# EAGLE board ttl (EAGLE 5.01)
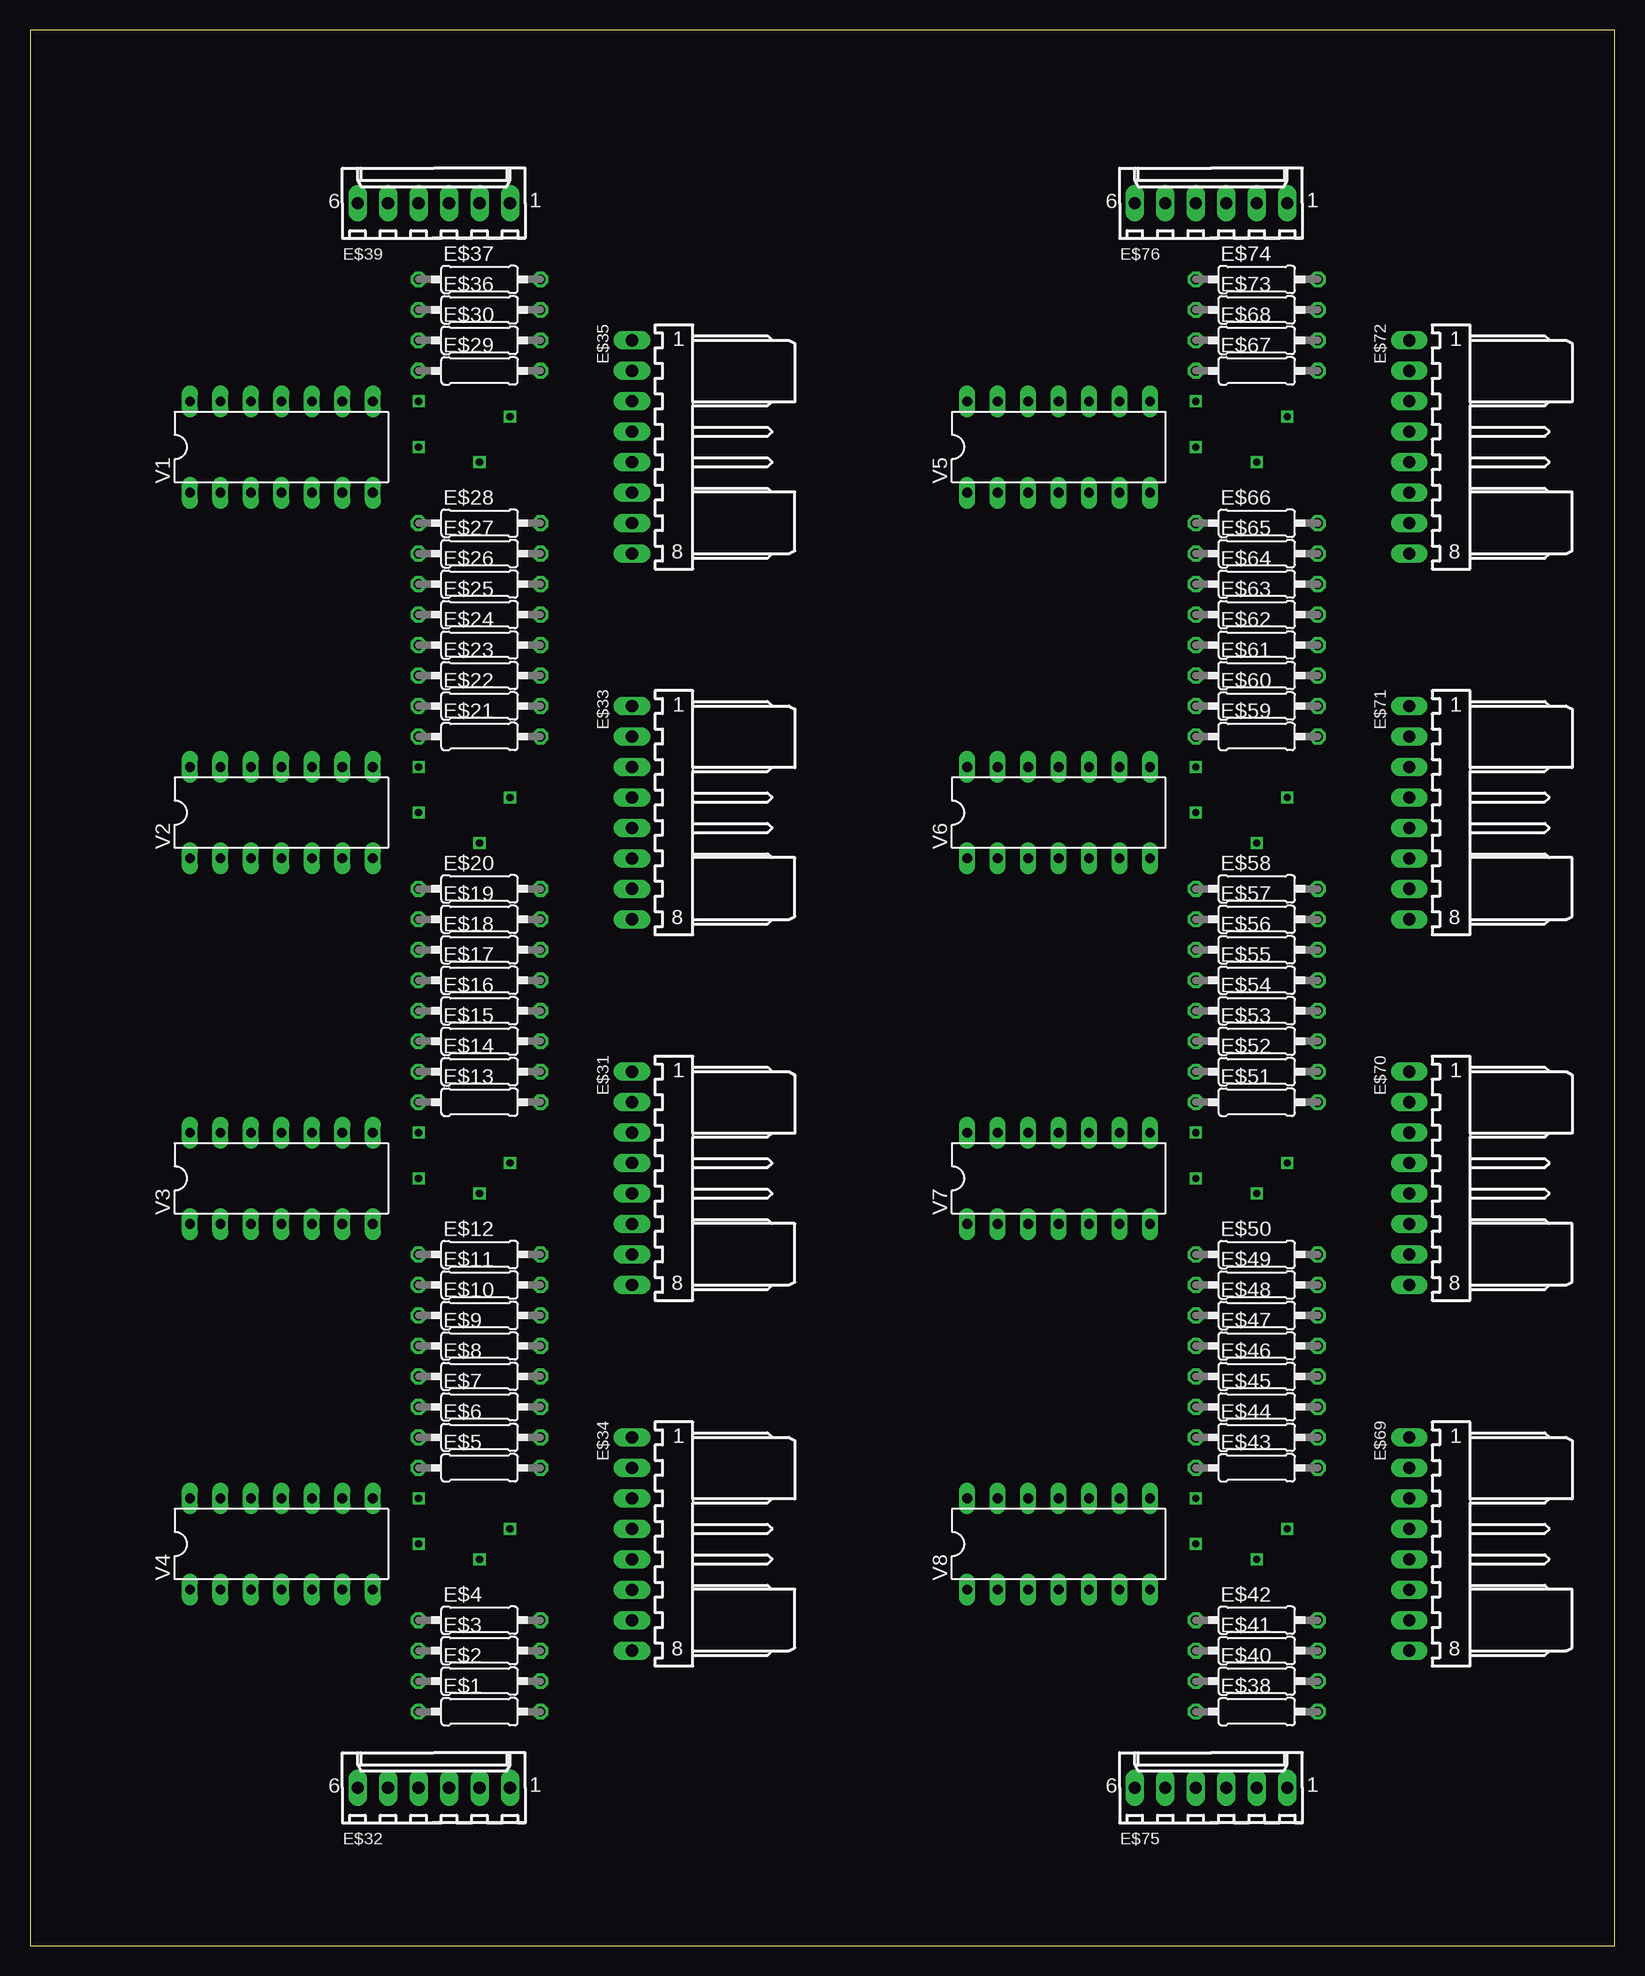
[diagram p0: board, top side]
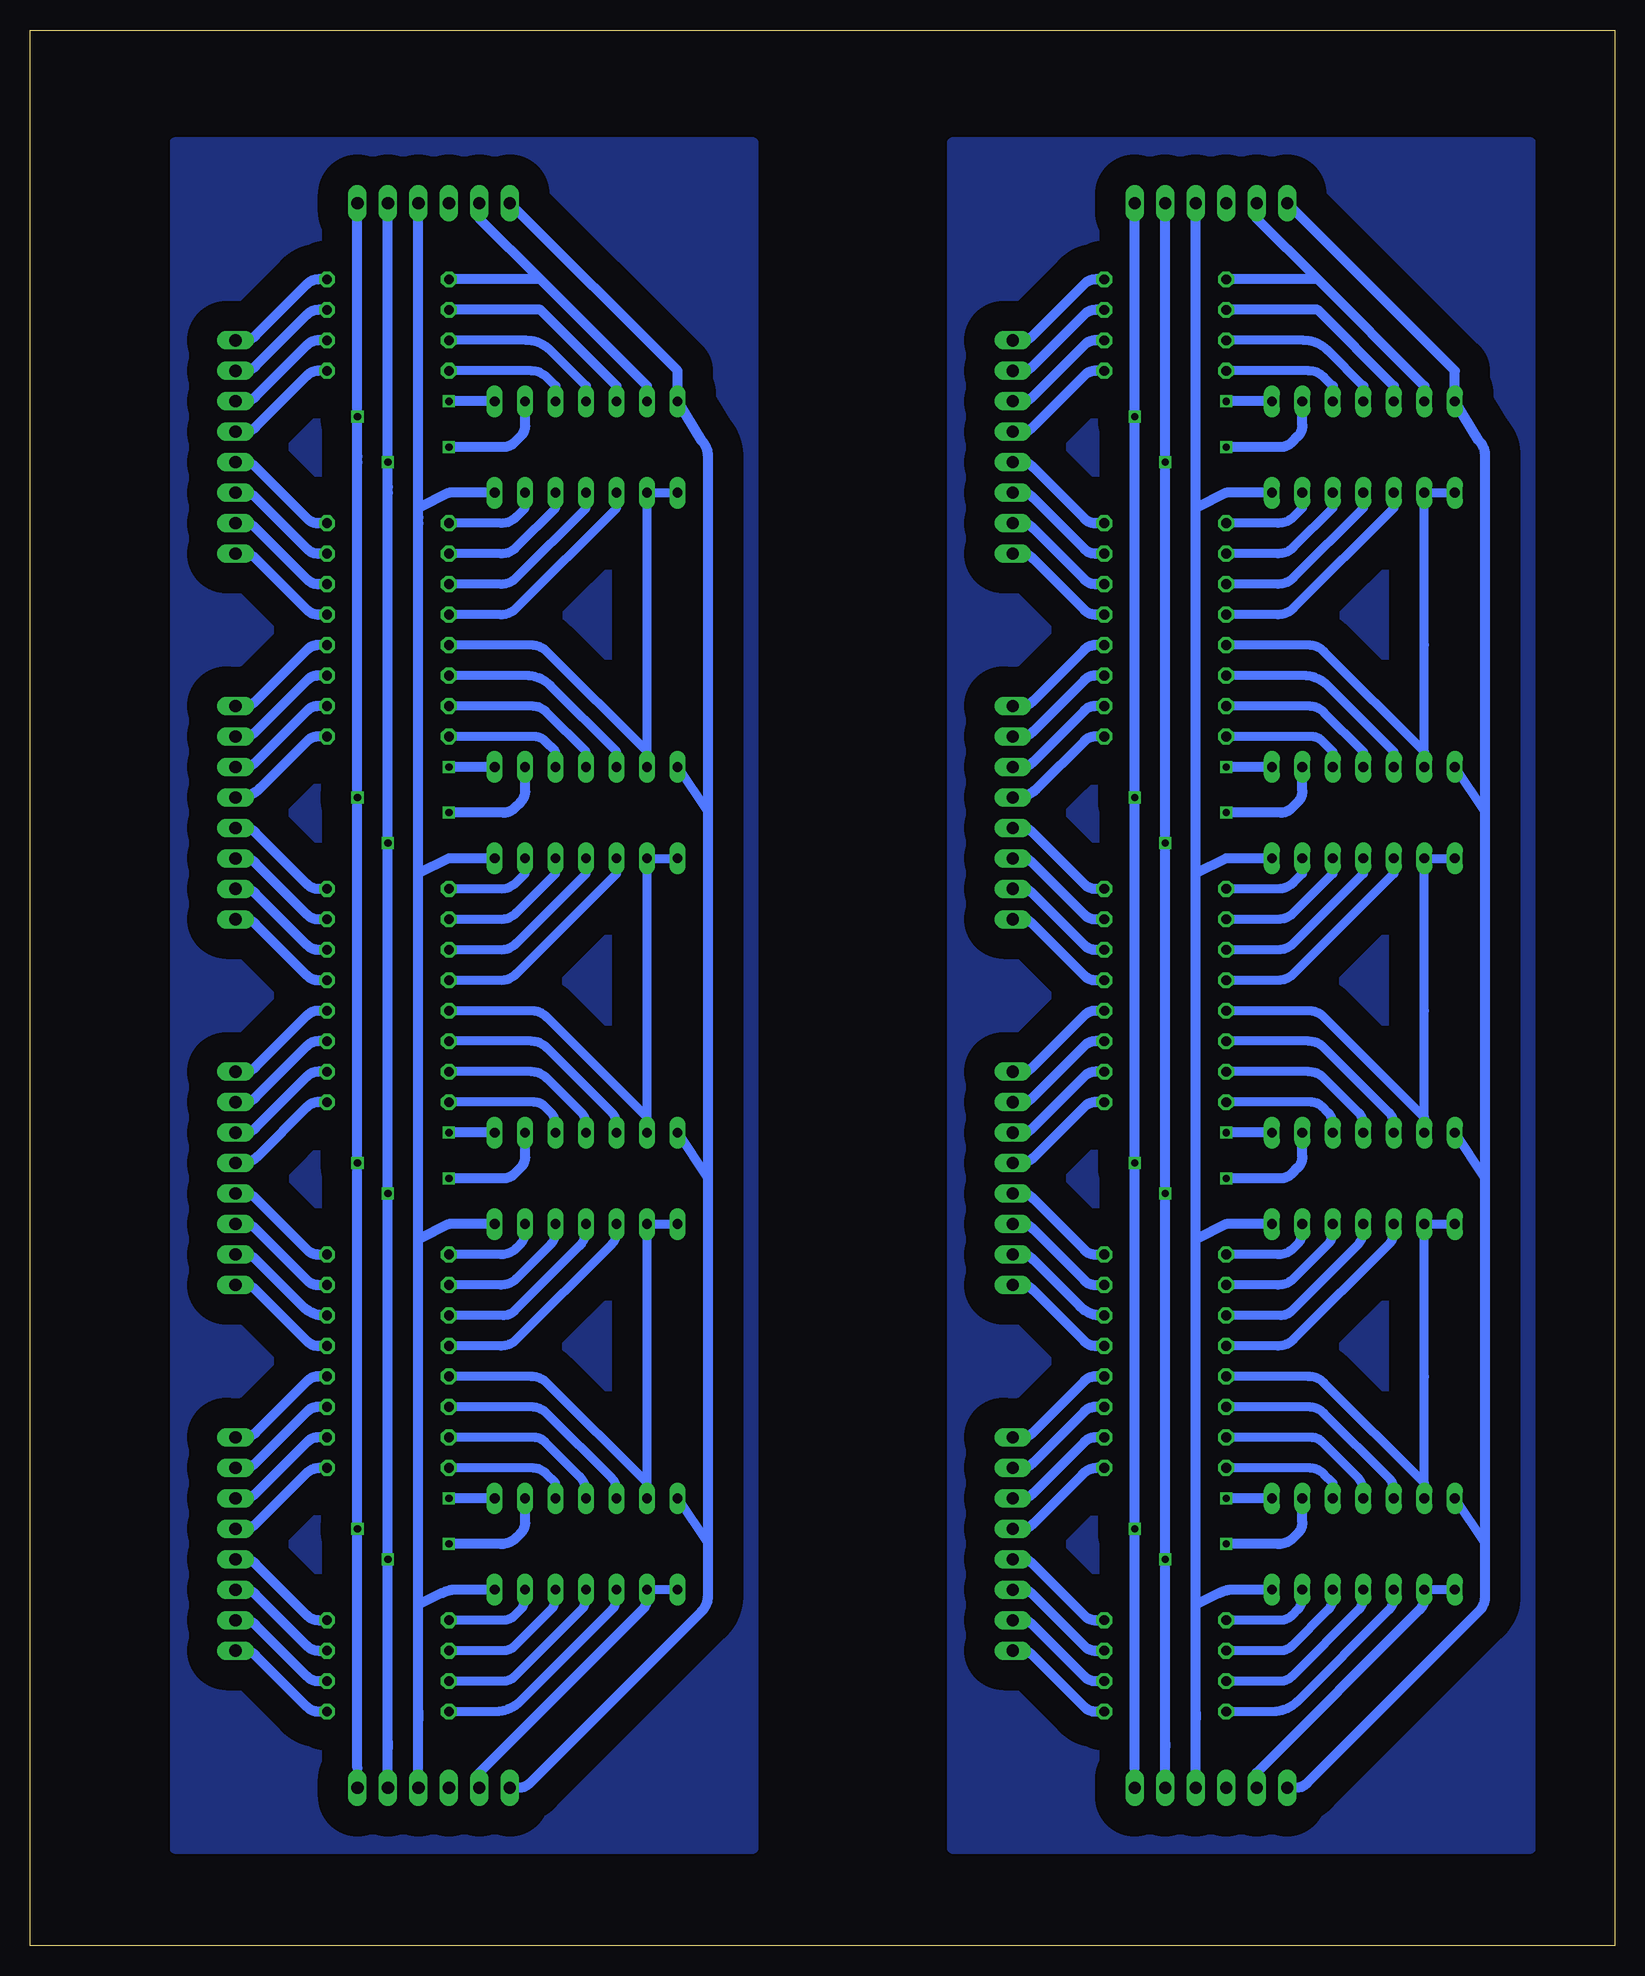
[diagram p1: board, bottom side, seen from below]

Size 132.06 x 159.69 mm. Coordinates in mm from the lower left corner, seen from the top.
Outline: 0,0 132.06,0 132.06,159.69 0,159.69 0,0
Copper layers (1*16): Top 0.035mm / dielectric 1.5mm / Bottom 0.035mm
Design rules "default *": minimum track width 32mil, minimum drill 24mil, track to track 8mil, track to pad 8mil, pad to pad 8mil, via to via 8mil, smd to smd 8mil, copper to edge 40mil, drill to drill 8mil, minimum pad ring 10mil, minimum via ring 8mil, stop-mask expansion 4mil, vias tented up to drill 0mil, thermal gap 10mil

## Footprints (pad centres in the part's own frame; a part is rotated, then mirrored left to right if it is on the bottom)
0207/10 = drill 0.813 octagon: 1 -5.08,0; 2 5.08,0
7395-08 = drill 1.016 long: 1 8.89,0; 2 6.35,0; 3 3.81,0; 4 1.27,0; 5 -1.27,0; 6 -3.81,0; 7 -6.35,0; 8 -8.89,0
6410-06 = drill 1.016 long: 1 6.35,0; 2 3.81,0; 3 1.27,0; 4 -1.27,0; 5 -3.81,0; 6 -6.35,0
DIL14 = drill 0.813 long: 1 -7.62,-3.81; 2 -5.08,-3.81; 3 -2.54,-3.81; 4 0,-3.81; 5 2.54,-3.81; 6 5.08,-3.81; 7 7.62,-3.81; 8 7.62,3.81; 9 5.08,3.81; 10 2.54,3.81; 11 0,3.81; 12 -2.54,3.81; 13 -5.08,3.81; 14 -7.62,3.81

## Placement (x,y rotation side)
E$1  [0207/10]  37.46,19.52 0 top
E$2  [0207/10]  37.46,22.06 0 top
E$3  [0207/10]  37.46,24.6 0 top
E$4  [0207/10]  37.46,27.14 0 top
E$5  [0207/10]  37.46,39.84 0 top
E$6  [0207/10]  37.46,42.38 0 top
E$7  [0207/10]  37.46,44.92 0 top
E$8  [0207/10]  37.46,47.46 0 top
E$9  [0207/10]  37.46,50 0 top
E$10  [0207/10]  37.46,52.54 0 top
E$11  [0207/10]  37.46,55.08 0 top
E$12  [0207/10]  37.46,57.62 0 top
E$13  [0207/10]  37.46,70.32 0 top
E$14  [0207/10]  37.46,72.86 0 top
E$15  [0207/10]  37.46,75.4 0 top
E$16  [0207/10]  37.46,77.94 0 top
E$17  [0207/10]  37.46,80.48 0 top
E$18  [0207/10]  37.46,83.02 0 top
E$19  [0207/10]  37.46,85.56 0 top
E$20  [0207/10]  37.46,88.1 0 top
E$21  [0207/10]  37.46,100.8 0 top
E$22  [0207/10]  37.46,103.34 0 top
E$23  [0207/10]  37.46,105.88 0 top
E$24  [0207/10]  37.46,108.42 0 top
E$25  [0207/10]  37.46,110.96 0 top
E$26  [0207/10]  37.46,113.5 0 top
E$27  [0207/10]  37.46,116.04 0 top
E$28  [0207/10]  37.46,118.58 0 top
E$29  [0207/10]  37.46,131.28 0 top
E$30  [0207/10]  37.46,133.82 0 top
E$31  [7395-08]  50.16,63.97 90 top
E$32  [6410-06]  33.65,13.17 0 top
E$33  [7395-08]  50.16,94.45 90 top
E$34  [7395-08]  50.16,33.49 90 top
E$35  [7395-08]  50.16,124.93 90 top
E$36  [0207/10]  37.46,136.36 0 top
E$37  [0207/10]  37.46,138.9 0 top
E$38  [0207/10]  102.23,19.52 0 top
E$39  [6410-06]  33.65,145.25 0 top
E$40  [0207/10]  102.23,22.06 0 top
E$41  [0207/10]  102.23,24.6 0 top
E$42  [0207/10]  102.23,27.14 0 top
E$43  [0207/10]  102.23,39.84 0 top
E$44  [0207/10]  102.23,42.38 0 top
E$45  [0207/10]  102.23,44.92 0 top
E$46  [0207/10]  102.23,47.46 0 top
E$47  [0207/10]  102.23,50 0 top
E$48  [0207/10]  102.23,52.54 0 top
E$49  [0207/10]  102.23,55.08 0 top
E$50  [0207/10]  102.23,57.62 0 top
E$51  [0207/10]  102.23,70.32 0 top
E$52  [0207/10]  102.23,72.86 0 top
E$53  [0207/10]  102.23,75.4 0 top
E$54  [0207/10]  102.23,77.94 0 top
E$55  [0207/10]  102.23,80.48 0 top
E$56  [0207/10]  102.23,83.02 0 top
E$57  [0207/10]  102.23,85.56 0 top
E$58  [0207/10]  102.23,88.1 0 top
E$59  [0207/10]  102.23,100.8 0 top
E$60  [0207/10]  102.23,103.34 0 top
E$61  [0207/10]  102.23,105.88 0 top
E$62  [0207/10]  102.23,108.42 0 top
E$63  [0207/10]  102.23,110.96 0 top
E$64  [0207/10]  102.23,113.5 0 top
E$65  [0207/10]  102.23,116.04 0 top
E$66  [0207/10]  102.23,118.58 0 top
E$67  [0207/10]  102.23,131.28 0 top
E$68  [0207/10]  102.23,133.82 0 top
E$69  [7395-08]  114.93,33.49 90 top
E$70  [7395-08]  114.93,63.97 90 top
E$71  [7395-08]  114.93,94.45 90 top
E$72  [7395-08]  114.93,124.93 90 top
E$73  [0207/10]  102.23,136.36 0 top
E$74  [0207/10]  102.23,138.9 0 top
E$75  [6410-06]  98.42,13.17 0 top
E$76  [6410-06]  98.42,145.25 0 top
V1  74164N  [DIL14]  20.95,124.93 0 top
V2  74164N  [DIL14]  20.95,94.45 0 top
V3  74164N  [DIL14]  20.95,63.97 0 top
V4  74164N  [DIL14]  20.95,33.49 0 top
V5  74164N  [DIL14]  85.72,124.93 0 top
V6  74164N  [DIL14]  85.72,94.45 0 top
V7  74164N  [DIL14]  85.72,63.97 0 top
V8  74164N  [DIL14]  85.72,33.49 0 top

## Library data of the parts
E$1-E$30 E$36-E$38 E$40-E$68 E$73 E$74 = resistor
E$31-E$35 E$39 E$69-E$72 E$75 E$76 = con-molex
V1-V8 = 74ttl-din

## Nets
S$1: E$1.2 E$34.8
S$2: E$5.2 E$34.4
S$3: E$6.2 E$34.3
S$4: E$7.2 E$34.2
S$5: E$8.2 E$34.1
S$6: E$9.2 E$31.8
S$7: E$10.2 E$31.7
S$8: E$4.2
S$9: E$31.6
S$10: E$13.2 E$31.4
S$11: E$15.2 E$31.2
S$12: E$16.2 E$31.1
S$13: E$17.2 E$33.8
S$14: E$14.2 E$31.3
S$15: E$18.2 E$33.7
S$16: E$19.2 E$33.6
S$17: E$20.2 E$33.5
S$18: E$24.2 E$33.1
S$19: E$36.1 V1.12
S$20: E$37.1 E$39.5 V1.13
S$21: E$29.2 E$35.4
S$22: E$30.2 E$35.3
S$23: E$35.2 E$36.2
S$24: E$35.1 E$37.2
S$25: E$31.5
S$27: V2.8
S$28: E$2.1 V4.4
S$29: E$3.1 V4.5
S$30: E$4.1 V4.6
S$31: E$5.1 V4.10
S$32: E$6.1 V4.11
S$33: E$7.1 V4.12
S$34: E$8.1 V3.1 V3.2 V4.13
S$35: E$9.1 V3.3
S$36: E$10.1 V3.4
S$37: E$11.1 V3.5
S$38: E$12.1 V3.6
S$39: E$13.1 V3.10
S$40: E$14.1 V3.11
S$41: E$15.1 V3.12
S$42: E$16.1 V2.1 V2.2 V3.13
S$43: E$17.1 V2.3
S$44: E$18.1 V2.4
S$45: E$19.1 V2.5
S$46: E$20.1 V2.6
S$47: E$21.1 V2.10
S$48: E$22.1 V2.11
S$49: E$23.1 V2.12
S$50: E$24.1 V1.1 V1.2 V2.13
S$54: V1.11
S$56: E$2.2 E$34.7
S$57: E$3.2
S$58: E$34.6
S$59: E$34.5
S$60: V1.10
S$61: E$32.6 E$39.6 V1.14 V2.14 V3.14 V4.14
S$63: E$32.1
S$65: E$1.1 V4.3
S$66: E$32.2 E$39.2
S$70: E$39.1
S$71: V2.9
S$72: V3.8
S$74: V4.8
S$78: E$32.5 V4.1 V4.2
S$80: E$32.3 E$39.3
S$81: E$40.1 V8.4
S$82: E$41.1 V8.5
S$83: E$21.2 E$33.4
S$84: E$22.2 E$33.3
S$85: E$23.2 E$33.2
S$86: E$42.1 V8.6
S$87: E$25.2 E$35.8
S$88: E$44.1 V8.11
S$89: E$26.2 E$35.7
S$90: E$45.1 V8.12
S$91: E$28.2 E$35.5
S$92: E$27.2 E$35.6
S$93: E$46.1 V7.1 V7.2 V8.13
S$94: E$47.1 V7.3
S$95: E$48.1 V7.4
S$96: E$49.1 V7.5
S$97: E$52.1 V7.11
S$98: E$53.1 V7.12
S$99: E$54.1 V6.1 V6.2 V7.13
S$100: E$55.1 V6.3
S$101: E$56.1 V6.4
S$102: E$57.1 V6.5
S$103: E$60.1 V6.11
S$104: E$61.1 V6.12
S$105: E$62.1 V5.1 V5.2 V6.13
S$106: E$58.1 V6.6
S$107: E$50.1 V7.6
S$108: E$51.1 V7.10
S$109: E$59.1 V6.10
S$110: E$43.1 V8.10
S$115: V5.11
S$116: V5.10
S$117: E$75.6 E$76.6 V5.14 V6.14 V7.14 V8.14
S$121: E$38.1 V8.3
S$122: V6.8
S$123: V6.9
S$124: V7.8
S$126: V8.8
S$130: E$38.2 E$69.8
S$131: E$52.2 E$70.3
S$132: E$40.2 E$69.7
S$133: E$59.2 E$71.4
S$134: E$60.2 E$71.3
S$135: E$61.2 E$71.2
S$136: E$63.2 E$72.8
S$137: E$65.2 E$72.6
S$138: E$43.2 E$69.4
S$139: E$44.2 E$69.3
S$140: E$45.2 E$69.2
S$141: E$46.2 E$69.1
S$142: E$47.2 E$70.8
S$143: E$48.2 E$70.7
S$144: E$51.2 E$70.4
S$145: E$53.2 E$70.2
S$146: E$54.2 E$70.1
S$147: E$55.2 E$71.8
S$148: E$56.2 E$71.7
S$149: E$62.2 E$71.1
S$150: E$64.2 E$72.7
S$151: E$67.2 E$72.4
S$152: E$68.2 E$72.3
S$153: E$72.2 E$73.2
S$154: E$72.1 E$74.2
S$155: E$75.3 E$76.3
S$156: E$76.1
S$157: E$75.2 E$76.2
S$158: E$66.2 E$72.5
S$159: E$57.2 E$71.6
S$160: E$58.2 E$71.5
S$161: E$41.2
S$162: E$42.2
S$163: E$70.6
S$164: E$70.5
S$165: E$69.6
S$166: E$69.5
S$167: E$75.1
S$168: E$75.5 V8.1 V8.2
S$169: E$73.1 V5.12
S$170: E$74.1 E$76.5 V5.13

## Tracks (layer width: path | path; a pad name or v marks a point on that pad's centre or on a via)
S$1
  Bottom 0.762: E$1.2 43.07,19.52
  Bottom 0.813: E$1.2 43.28,19.52 arc45 44.18,19.89 48.52,24.23 arc-45 49.42,24.6 E$34.8
S$2
  Bottom 0.813: E$5.2 43.07,39.84 arc-45 44.34,39.31 48.52,35.13 arc45 49.42,34.76 E$34.4
S$3
  Bottom 0.813: E$6.2 43.28,42.38 arc-45 44.18,42.01 48.52,37.67 arc45 49.42,37.3 E$34.3
S$4
  Bottom 0.813: E$7.2 43.28,44.92 arc-45 44.18,44.55 48.52,40.21 arc45 49.42,39.84 E$34.2
S$5
  Bottom 0.813: E$8.2 43.28,47.46 arc-45 44.18,47.09 48.52,42.75 arc45 49.42,42.38 E$34.1
S$6
  Bottom 0.813: E$9.2 43.28,50 arc45 44.18,50.37 48.52,54.71 arc-45 49.42,55.08 E$31.8
S$7
  Bottom 0.813: E$10.2 42.76,52.54 arc45 44.55,53.28 48.52,57.25 arc-45 49.42,57.62 E$31.7
S$8
  Bottom 0.762: E$4.2 43.07,27.14
S$9
  Bottom 0.813: 42.54,55.08 43.28,55.08 arc45 44.18,55.45 48.52,59.79 arc-45 49.42,60.16 E$31.6
S$10
  Bottom 0.813: E$13.2 43.28,70.32 arc-45 44.18,69.95 48.36,65.77 arc45 49.63,65.24 E$31.4
S$11
  Bottom 0.813: E$15.2 43.28,75.4 arc-45 44.18,75.03 48.52,70.69 arc45 49.42,70.32 E$31.2
S$12
  Bottom 0.813: E$16.2 43.28,77.94 arc-45 44.18,77.57 48.52,73.23 arc45 49.42,72.86 E$31.1
S$13
  Bottom 0.813: E$17.2 43.28,80.48 arc45 44.18,80.85 48.52,85.19 arc-45 49.42,85.56 E$33.8
S$14
  Bottom 0.813: 42.79,72.86 E$14.2 43.28,72.86 arc-45 44.18,72.49 48.52,68.15 arc45 49.42,67.78 E$31.3
S$15
  Bottom 0.813: E$18.2 43.28,83.02 arc45 44.18,83.39 48.52,87.73 arc-45 49.42,88.1 E$33.7
S$16
  Bottom 0.813: E$19.2 43.28,85.56 arc45 44.18,85.93 48.52,90.27 arc-45 49.42,90.64 E$33.6
S$17
  Bottom 0.813: E$20.2 43.28,88.1 arc45 44.18,88.47 48.52,92.81 arc-45 49.42,93.18 E$33.5
S$18
  Bottom 0.813: E$24.2 43.28,108.42 arc-45 44.18,108.05 48.52,103.71 arc45 49.42,103.34 E$33.1
S$19
  Bottom 0.813: E$36.1 24.76,136.36 18.41,130.01 V1.12
S$20
  Bottom 0.813: E$39.5 29.84,143.98 24.76,138.9 | 24.76,138.9 E$37.1 | 24.76,138.9 15.87,130.01 V1.13
S$21
  Bottom 0.813: E$29.2 43.28,131.28 arc-45 44.18,130.91 48.52,126.57 arc45 49.42,126.2 E$35.4
S$22
  Bottom 0.813: E$30.2 43.28,133.82 arc-45 44.18,133.45 48.52,129.11 arc45 49.42,128.74 E$35.3
S$23
  Bottom 0.813: E$36.2 43.28,136.36 arc-45 44.18,135.99 48.52,131.65 arc45 49.42,131.28 E$35.2
S$24
  Bottom 0.813: E$37.2 43.28,138.9 arc-45 44.18,138.53 48.52,134.19 arc45 49.42,133.82 E$35.1
S$25
  Bottom 0.813: 42.54,57.62 43.28,57.62 arc45 44.18,57.99 48.52,62.33 arc-45 49.42,62.7 E$31.5
S$26
  Bottom 0.762: 18.41,119.85 26.77,111.49 arc45 28.04,110.96 32.38,110.96
S$27  (via drill 0.6)
  Bottom 0.813: V2.8 v32.38,98.26
S$28
  Bottom 0.762: E$2.1 27.83,22.06 arc-45 26.93,22.43 21.32,28.04 arc-45 20.95,28.94 V4.4
S$29
  Bottom 0.762: E$3.1 27.83,24.6 arc-45 26.93,24.97 23.86,28.04 arc-45 23.49,28.94 V4.5
S$30
  Bottom 0.762: E$4.1 27.83,27.14 arc-45 26.93,27.51 26.4,28.04 arc-45 26.03,28.94 V4.6
S$31
  Bottom 0.762: E$5.1 25.5,39.84 arc45 24.23,39.31 23.49,38.57 V4.10
S$32
  Bottom 0.762: E$6.1 25.29,42.38 arc45 24.39,42.01 21.48,39.1 arc45 20.95,37.83 V4.11
S$33
  Bottom 0.762: E$7.1 25.5,44.92 arc45 24.23,44.39 18.78,38.94 arc45 18.41,38.04 V4.12
S$34
  Bottom 0.762: V4.13 15.87,38.57 24.23,46.93 arc-45 25.5,47.46 E$8.1 | V3.1 V3.2 V4.13 | V4.13 15.87,47.46
S$35
  Bottom 0.762: E$9.1 28.04,50 arc-45 26.77,50.53 18.78,58.52 arc-45 18.41,59.42 V3.3
S$36
  Bottom 0.762: E$10.1 27.83,52.54 arc-45 26.93,52.91 21.48,58.36 arc-45 20.95,59.63 V3.4
S$37
  Bottom 0.762: E$11.1 28.04,55.08 arc-45 26.77,55.61 23.86,58.52 arc-45 23.49,59.42 V3.5
S$38
  Bottom 0.762: E$12.1 28.04,57.62 arc-45 26.77,58.15 26.4,58.52 arc-45 26.03,59.42 V3.6
S$39
  Bottom 0.762: E$13.1 25.29,70.32 arc45 24.39,69.95 23.86,69.42 arc45 23.49,68.52 V3.10
S$40
  Bottom 0.762: E$14.1 25.5,72.86 arc45 24.23,72.33 21.32,69.42 arc45 20.95,68.52 V3.11
S$41
  Bottom 0.762: E$15.1 25.5,75.4 arc45 24.23,74.87 18.78,69.42 arc45 18.41,68.52 V3.12
S$42
  Bottom 0.762: V3.13 15.87,69.05 24.23,77.41 arc-45 25.5,77.94 E$16.1 | V2.1 V2.2 V3.13 | V3.13 15.87,77.94
S$43
  Bottom 0.762: E$17.1 28.04,80.48 arc-45 26.77,81.01 18.41,89.37 V2.3
S$44
  Bottom 0.762: E$18.1 28.04,83.02 arc-45 26.77,83.55 20.95,89.37 V2.4
S$45
  Bottom 0.762: E$19.1 28.04,85.56 arc-45 26.77,86.09 23.49,89.37 V2.5
S$46
  Bottom 0.762: E$20.1 28.04,88.1 arc-45 26.77,88.63 26.03,89.37 V2.6
S$47
  Bottom 0.762: E$21.1 25.29,100.8 arc45 24.39,100.43 23.49,99.53 V2.10
S$48
  Bottom 0.762: E$22.1 25.5,103.34 arc45 24.23,102.81 20.95,99.53 V2.11
S$49
  Bottom 0.762: E$23.1 25.94,105.88 arc45 23.93,105.05 18.41,99.53 V2.12
S$50
  Bottom 0.762: V1.1 V1.2 V2.13 15.87,99.53 | 15.87,99.53 24.23,107.89 arc-45 25.5,108.42 E$24.1 | 15.87,99.53 15.87,108.42
S$51
  Bottom 0.762: 20.95,119.85 26.77,114.03 arc45 28.04,113.5 32.38,113.5
S$52
  Bottom 0.762: 23.49,119.85 26.77,116.57 arc45 28.04,116.04 32.38,116.04
S$53
  Bottom 0.762: 26.03,119.85 26.77,119.11 arc45 28.04,118.58 32.38,118.58
S$54
  Bottom 0.762: 20.95,130.01 23.93,132.99 arc-45 25.94,133.82 32.38,133.82
  Bottom 0.813: V1.11 20.95,130.01
S$55  (via drill 0.6)
  Bottom 0.813: 28.57,128.74 v32.38,128.74
S$56
  Bottom 0.762: E$2.2 43.07,22.06
  Bottom 0.813: E$2.2 43.28,22.06 arc45 44.18,22.43 48.52,26.77 arc-45 49.42,27.14 E$34.7
S$57
  Bottom 0.762: E$3.2 43.07,24.6
S$58
  Bottom 0.813: 42.54,24.6 43.28,24.6 arc45 44.18,24.97 48.52,29.31 arc-45 49.42,29.68 E$34.6
S$59
  Bottom 0.813: 42.54,27.14 43.28,27.14 arc45 44.18,27.51 48.52,31.85 arc-45 49.42,32.22 E$34.5
S$60
  Bottom 0.762: 23.49,130.01 24.23,130.75 arc-45 25.5,131.28 32.38,131.28
  Bottom 0.813: V1.10 23.49,130.01
S$61
  Bottom 0.762: 10.79,30.95 10.79,29.97 | 10.79,98.26 10.79,94.45 V2.14 | 10.79,67.78 10.79,63.97 V3.14 | 10.79,37.3 10.79,33.49 V4.14
  Bottom 0.813: E$39.6 13.33,131.28 V1.14 11.32,125.46 arc45 10.79,124.19 10.79,98.26 10.79,67.78 10.79,37.3 10.79,30.95 10.79,29.15 arc45 11.32,27.88 25.66,13.54 arc45 26.56,13.17 E$32.6
S$62  (via drill 0.6)
  Bottom 0.813: v32.38,124.93 27.83,124.93 arc-45 26.93,125.3 26.4,125.83 arc-45 26.03,126.73 26.03,128.74
S$63
  Bottom 0.813: E$32.1 40,14.44
S$64
  Bottom 0.813: 28.57,121.12 32.38,121.12 34.92,119.85
S$65
  Bottom 0.762: E$1.1 28.48,19.52 arc-45 26.47,20.35 18.78,28.04 arc-45 18.41,28.94 V4.3
S$66  (via drill 0.6)
  Bottom 0.813: 37.46,121.12 v37.46,91.91 v37.46,62.7 v37.46,32.22 37.46,16.98 | 37.46,121.12 37.46,121.61 | 37.46,16.98 37.46,16.48 | 37.46,121.12 v37.46,123.66 E$39.2 | E$32.2 37.46,16.98
S$67
  Bottom 0.813: 28.57,90.64 32.38,90.64 34.92,89.37
S$68
  Bottom 0.813: 28.57,60.16 32.38,60.16 34.92,58.89
S$69
  Bottom 0.813: 34.92,28.41 32.92,29.41 arc27 31.78,29.68 28.57,29.68
S$70  (via drill 0.6)
  Bottom 0.813: 40,123.66 v40,95.72 v40,65.24 v40,34.76 40,14.83 | 40,123.66 40,124.14 | 40,123.66 v40,127.47 E$39.1
S$71  (via drill 0.6)
  Bottom 0.813: v32.38,94.45 27.83,94.45 arc-45 26.93,94.82 26.4,95.35 arc-45 26.03,96.25 V2.9
S$72  (via drill 0.6)
  Bottom 0.813: V3.8 v32.38,67.78
S$73  (via drill 0.6)
  other vias: 32.38,63.97
S$74  (via drill 0.6)
  Bottom 0.813: V4.8 v32.38,37.3
S$75  (via drill 0.6)
  other vias: 32.38,33.49
S$76
  Bottom 0.813: 32.38,63.97 27.83,63.97 arc-45 26.93,64.34 26.4,64.87 arc-45 26.03,65.77 26.03,67.78
S$77
  Bottom 0.813: 32.38,33.49 28.04,33.49 arc-45 26.77,34.02 26.4,34.39 arc-45 26.03,35.29 26.03,37.3
S$78
  Bottom 0.762: V4.1 V4.2 V4.1
  Bottom 0.813: E$32.5 29.84,14.44 16.24,28.04 arc-45 15.87,28.94 V4.2
S$79
  pour Bottom (isolate 2.54): 6.98,8.09 6.98,150.33 55.24,150.33 55.24,8.09
S$80
  Bottom 0.813: 34.92,19.52 34.92,18.86 | 34.92,19.52 34.92,118.58 | 34.92,118.58 34.92,119.06 | 34.92,118.58 E$39.3 | E$32.3 34.92,19.52
S$81
  Bottom 0.762: E$40.1 92.6,22.06 arc-45 91.7,22.43 86.09,28.04 arc-45 85.72,28.94 V8.4
S$82
  Bottom 0.762: E$41.1 92.6,24.6 arc-45 91.7,24.97 88.63,28.04 arc-45 88.26,28.94 V8.5
S$83
  Bottom 0.762: E$21.2 43.07,100.8
  Bottom 0.813: E$21.2 43.28,100.8 arc-45 44.18,100.43 48.15,96.46 arc45 49.94,95.72 E$33.4
S$84
  Bottom 0.762: E$22.2 42.63,103.34
  Bottom 0.813: E$22.2 43.28,103.34 arc-45 44.18,102.97 48.52,98.63 arc45 49.42,98.26 E$33.3
S$85
  Bottom 0.762: E$23.2 42.76,105.88
  Bottom 0.813: E$23.2 43.28,105.88 arc-45 44.18,105.51 48.52,101.17 arc45 49.42,100.8 E$33.2
S$86
  Bottom 0.762: E$42.1 92.6,27.14 arc-45 91.7,27.51 91.17,28.04 arc-45 90.8,28.94 V8.6
S$87
  Bottom 0.762: E$25.2 42.63,110.96
  Bottom 0.813: E$25.2 43.28,110.96 arc45 44.18,111.33 48.52,115.67 arc-45 49.42,116.04 E$35.8
S$88
  Bottom 0.762: E$44.1 90.06,42.38 arc45 89.16,42.01 86.25,39.1 arc45 85.72,37.83 V8.11
S$89
  Bottom 0.762: 42.23,113.5 E$26.2
  Bottom 0.813: E$26.2 43.28,113.5 arc45 44.18,113.87 48.52,118.21 arc-45 49.42,118.58 E$35.7
S$90
  Bottom 0.762: E$45.1 90.27,44.92 arc45 89,44.39 83.55,38.94 arc45 83.18,38.04 V8.12
S$91
  Bottom 0.762: E$28.2 42.63,118.58
  Bottom 0.813: E$28.2 43.28,118.58 arc45 44.18,118.95 48.52,123.29 arc-45 49.42,123.66 E$35.5
S$92
  Bottom 0.762: E$27.2 42.63,116.04
  Bottom 0.813: E$27.2 43.28,116.04 arc45 44.18,116.41 48.52,120.75 arc-45 49.42,121.12 E$35.6
S$93
  Bottom 0.762: V8.13 80.64,38.57 89,46.93 arc-45 90.27,47.46 E$46.1 | V7.1 V7.2 V8.13 | V8.13 80.64,47.46
S$94
  Bottom 0.762: E$47.1 92.81,50 arc-45 91.54,50.53 83.55,58.52 arc-45 83.18,59.42 V7.3
S$95
  Bottom 0.762: E$48.1 92.6,52.54 arc-45 91.7,52.91 86.25,58.36 arc-45 85.72,59.63 V7.4
S$96
  Bottom 0.762: E$49.1 92.81,55.08 arc-45 91.54,55.61 88.63,58.52 arc-45 88.26,59.42 V7.5
S$97
  Bottom 0.762: E$52.1 90.27,72.86 arc45 89,72.33 86.09,69.42 arc45 85.72,68.52 V7.11
S$98
  Bottom 0.762: E$53.1 90.27,75.4 arc45 89,74.87 83.55,69.42 arc45 83.18,68.52 V7.12
S$99
  Bottom 0.762: V7.13 80.64,69.05 89,77.41 arc-45 90.27,77.94 E$54.1 | V6.1 V6.2 V7.13 | V7.13 80.64,77.94
S$100
  Bottom 0.762: E$55.1 92.81,80.48 arc-45 91.54,81.01 83.18,89.37 V6.3
S$101
  Bottom 0.762: E$56.1 92.81,83.02 arc-45 91.54,83.55 85.72,89.37 V6.4
S$102
  Bottom 0.762: E$57.1 92.81,85.56 arc-45 91.54,86.09 88.26,89.37 V6.5
S$103
  Bottom 0.762: E$60.1 90.27,103.34 arc45 89,102.81 85.72,99.53 V6.11
S$104
  Bottom 0.762: E$61.1 90.71,105.88 arc45 88.7,105.05 83.18,99.53 V6.12
S$105
  Bottom 0.762: V5.1 V5.2 V6.13 80.64,99.53 | 80.64,99.53 89,107.89 arc-45 90.27,108.42 E$62.1 | 80.64,99.53 80.64,108.42
S$106
  Bottom 0.762: E$58.1 92.81,88.1 arc-45 91.54,88.63 90.8,89.37 V6.6
S$107
  Bottom 0.762: E$50.1 92.81,57.62 arc-45 91.54,58.15 91.17,58.52 arc-45 90.8,59.42 V7.6
S$108
  Bottom 0.762: E$51.1 90.06,70.32 arc45 89.16,69.95 88.63,69.42 arc45 88.26,68.52 V7.10
S$109
  Bottom 0.762: E$59.1 90.06,100.8 arc45 89.16,100.43 88.26,99.53 V6.10
S$110
  Bottom 0.762: E$43.1 90.27,39.84 arc45 89,39.31 88.26,38.57 V8.10
S$111
  Bottom 0.762: 83.18,119.85 91.54,111.49 arc45 92.81,110.96 97.15,110.96
S$112
  Bottom 0.762: 85.72,119.85 91.54,114.03 arc45 92.81,113.5 97.15,113.5
S$113
  Bottom 0.762: 88.26,119.85 91.54,116.57 arc45 92.81,116.04 97.15,116.04
S$114
  Bottom 0.762: 90.8,119.85 91.54,119.11 arc45 92.81,118.58 97.15,118.58
S$115
  Bottom 0.762: 85.72,130.01 88.7,132.99 arc-45 90.71,133.82 97.15,133.82
  Bottom 0.813: V5.11 85.72,130.01
S$116
  Bottom 0.762: 88.26,130.01 89,130.75 arc-45 90.27,131.28 97.15,131.28
  Bottom 0.813: V5.10 88.26,130.01
S$117
  Bottom 0.762: 75.56,30.95 75.56,29.97 | 75.56,98.26 75.56,94.45 V6.14 | 75.56,67.78 75.56,63.97 V7.14 | 75.56,37.3 75.56,33.49 V8.14
  Bottom 0.813: E$76.6 78.1,131.28 V5.14 76.09,125.46 arc45 75.56,124.19 75.56,98.26 75.56,67.78 75.56,37.3 75.56,30.95 75.56,29.15 arc45 76.09,27.88 90.43,13.54 arc45 91.33,13.17 E$75.6
S$118
  Bottom 0.813: 93.34,90.64 97.15,90.64 99.69,89.37
S$119
  Bottom 0.813: 93.34,60.16 97.15,60.16 99.69,58.89
S$120
  Bottom 0.813: 99.69,28.41 97.69,29.41 arc27 96.55,29.68 93.34,29.68
S$121
  Bottom 0.762: E$38.1 93.25,19.52 arc-45 91.24,20.35 83.55,28.04 arc-45 83.18,28.94 V8.3
S$122  (via drill 0.6)
  Bottom 0.813: V6.8 v97.15,98.26
S$123  (via drill 0.6)
  Bottom 0.813: v97.15,94.45 92.6,94.45 arc-45 91.7,94.82 91.17,95.35 arc-45 90.8,96.25 V6.9
S$124  (via drill 0.6)
  Bottom 0.813: V7.8 v97.15,67.78
S$125  (via drill 0.6)
  other vias: 97.15,63.97
S$126  (via drill 0.6)
  Bottom 0.813: V8.8 v97.15,37.3
S$127  (via drill 0.6)
  other vias: 97.15,33.49
S$128
  Bottom 0.813: 97.15,63.97 92.6,63.97 arc-45 91.7,64.34 91.17,64.87 arc-45 90.8,65.77 90.8,67.78
S$129
  Bottom 0.813: 97.15,33.49 92.81,33.49 arc-45 91.54,34.02 91.17,34.39 arc-45 90.8,35.29 90.8,37.3
S$130
  Bottom 0.762: E$38.2 107.84,19.52
  Bottom 0.813: E$38.2 108.05,19.52 arc45 108.95,19.89 113.29,24.23 arc-45 114.19,24.6 E$69.8
S$131
  Bottom 0.813: 107.56,72.86 E$52.2 108.05,72.86 arc-45 108.95,72.49 113.29,68.15 arc45 114.19,67.78 E$70.3
S$132
  Bottom 0.762: E$40.2 107.84,22.06
  Bottom 0.813: E$40.2 108.05,22.06 arc45 108.95,22.43 113.29,26.77 arc-45 114.19,27.14 E$69.7
S$133
  Bottom 0.762: E$59.2 107.84,100.8
  Bottom 0.813: E$59.2 108.05,100.8 arc-45 108.95,100.43 112.92,96.46 arc45 114.71,95.72 E$71.4
S$134
  Bottom 0.762: E$60.2 107.4,103.34
  Bottom 0.813: E$60.2 108.05,103.34 arc-45 108.95,102.97 113.29,98.63 arc45 114.19,98.26 E$71.3
S$135
  Bottom 0.762: E$61.2 107.53,105.88
  Bottom 0.813: E$61.2 108.05,105.88 arc-45 108.95,105.51 113.29,101.17 arc45 114.19,100.8 E$71.2
S$136
  Bottom 0.762: E$63.2 107.4,110.96
  Bottom 0.813: E$63.2 108.05,110.96 arc45 108.95,111.33 113.29,115.67 arc-45 114.19,116.04 E$72.8
S$137
  Bottom 0.762: E$65.2 107.4,116.04
  Bottom 0.813: E$65.2 108.05,116.04 arc45 108.95,116.41 113.29,120.75 arc-45 114.19,121.12 E$72.6
S$138
  Bottom 0.813: E$43.2 107.84,39.84 arc-45 109.11,39.31 113.29,35.13 arc45 114.19,34.76 E$69.4
S$139
  Bottom 0.813: E$44.2 108.05,42.38 arc-45 108.95,42.01 113.29,37.67 arc45 114.19,37.3 E$69.3
S$140
  Bottom 0.813: E$45.2 108.05,44.92 arc-45 108.95,44.55 113.29,40.21 arc45 114.19,39.84 E$69.2
S$141
  Bottom 0.813: E$46.2 108.05,47.46 arc-45 108.95,47.09 113.29,42.75 arc45 114.19,42.38 E$69.1
S$142
  Bottom 0.813: E$47.2 108.05,50 arc45 108.95,50.37 113.29,54.71 arc-45 114.19,55.08 E$70.8
S$143
  Bottom 0.813: E$48.2 107.53,52.54 arc45 109.32,53.28 113.29,57.25 arc-45 114.19,57.62 E$70.7
S$144
  Bottom 0.813: E$51.2 108.05,70.32 arc-45 108.95,69.95 113.13,65.77 arc45 114.4,65.24 E$70.4
S$145
  Bottom 0.813: E$53.2 108.05,75.4 arc-45 108.95,75.03 113.29,70.69 arc45 114.19,70.32 E$70.2
S$146
  Bottom 0.813: E$54.2 108.05,77.94 arc-45 108.95,77.57 113.29,73.23 arc45 114.19,72.86 E$70.1
S$147
  Bottom 0.813: E$55.2 108.05,80.48 arc45 108.95,80.85 113.29,85.19 arc-45 114.19,85.56 E$71.8
S$148
  Bottom 0.813: E$56.2 108.05,83.02 arc45 108.95,83.39 113.29,87.73 arc-45 114.19,88.1 E$71.7
S$149
  Bottom 0.813: E$62.2 108.05,108.42 arc-45 108.95,108.05 113.29,103.71 arc45 114.19,103.34 E$71.1
S$150
  Bottom 0.762: E$64.2 107,113.5
  Bottom 0.813: E$64.2 108.05,113.5 arc45 108.95,113.87 113.29,118.21 arc-45 114.19,118.58 E$72.7
S$151
  Bottom 0.813: E$67.2 108.05,131.28 arc-45 108.95,130.91 113.29,126.57 arc45 114.19,126.2 E$72.4
S$152
  Bottom 0.813: E$68.2 108.05,133.82 arc-45 108.95,133.45 113.29,129.11 arc45 114.19,128.74 E$72.3
S$153
  Bottom 0.813: E$73.2 108.05,136.36 arc-45 108.95,135.99 113.29,131.65 arc45 114.19,131.28 E$72.2
S$154
  Bottom 0.813: E$74.2 108.05,138.9 arc-45 108.95,138.53 113.29,134.19 arc45 114.19,133.82 E$72.1
S$155
  Bottom 0.813: 99.69,19.52 99.69,18.86 | 99.69,19.52 99.69,118.58 | 99.69,118.58 99.69,119.06 | 99.69,118.58 E$76.3 | E$75.3 99.69,19.52
S$156  (via drill 0.6)
  Bottom 0.813: 104.77,123.66 v104.77,95.72 v104.77,65.24 v104.77,34.76 104.77,14.83 | 104.77,123.66 104.77,124.14 | 104.77,123.66 v104.77,127.47 E$76.1
S$157  (via drill 0.6)
  Bottom 0.813: 102.23,121.12 v102.23,91.91 v102.23,62.7 v102.23,32.22 102.23,16.98 | 102.23,121.12 102.23,121.61 | 102.23,16.98 102.23,16.48 | 102.23,121.12 v102.23,123.66 E$76.2 | E$75.2 102.23,16.98
S$158
  Bottom 0.762: E$66.2 107.4,118.58
  Bottom 0.813: E$66.2 108.05,118.58 arc45 108.95,118.95 113.29,123.29 arc-45 114.19,123.66 E$72.5
S$159
  Bottom 0.813: E$57.2 108.05,85.56 arc45 108.95,85.93 113.29,90.27 arc-45 114.19,90.64 E$71.6
S$160
  Bottom 0.813: E$58.2 108.05,88.1 arc45 108.95,88.47 113.29,92.81 arc-45 114.19,93.18 E$71.5
S$161
  Bottom 0.762: E$41.2 107.84,24.6
S$162
  Bottom 0.762: E$42.2 107.84,27.14
S$163
  Bottom 0.813: 107.31,55.08 108.05,55.08 arc45 108.95,55.45 113.29,59.79 arc-45 114.19,60.16 E$70.6
S$164
  Bottom 0.813: 107.31,57.62 108.05,57.62 arc45 108.95,57.99 113.29,62.33 arc-45 114.19,62.7 E$70.5
S$165
  Bottom 0.813: 107.31,24.6 108.05,24.6 arc45 108.95,24.97 113.29,29.31 arc-45 114.19,29.68 E$69.6
S$166
  Bottom 0.813: 107.31,27.14 108.05,27.14 arc45 108.95,27.51 113.29,31.85 arc-45 114.19,32.22 E$69.5
S$167
  Bottom 0.813: E$75.1 104.77,14.44
S$168
  Bottom 0.762: V8.1 V8.2 V8.1
  Bottom 0.813: E$75.5 94.61,14.44 81.01,28.04 arc-45 80.64,28.94 V8.2
S$169
  Bottom 0.813: E$73.1 89.53,136.36 83.18,130.01 V5.12
S$170
  Bottom 0.813: E$76.5 94.61,143.98 89.53,138.9 | 89.53,138.9 E$74.1 | 89.53,138.9 80.64,130.01 V5.13
S$171  (via drill 0.6)
  Bottom 0.813: 93.34,128.74 v97.15,128.74
S$172  (via drill 0.6)
  Bottom 0.813: v97.15,124.93 92.6,124.93 arc-45 91.7,125.3 91.17,125.83 arc-45 90.8,126.73 90.8,128.74
S$173
  Bottom 0.813: 93.34,121.12 97.15,121.12 99.69,119.85
S$174
  pour Bottom (isolate 2.54): 71.75,8.09 71.75,150.33 120.01,150.33 120.01,8.09